# Altium PCB zynqEXP.PcbDoc (part 1 of 2)
Units mil, origin at the board's own origin, x right, y up, seen from the top; angles counter-clockwise.
Board outline 7005 x 5105 mil, 2 copper layers (Top Layer, Bottom Layer); 92 components, 234 nets, 748 pads, 222 vias.
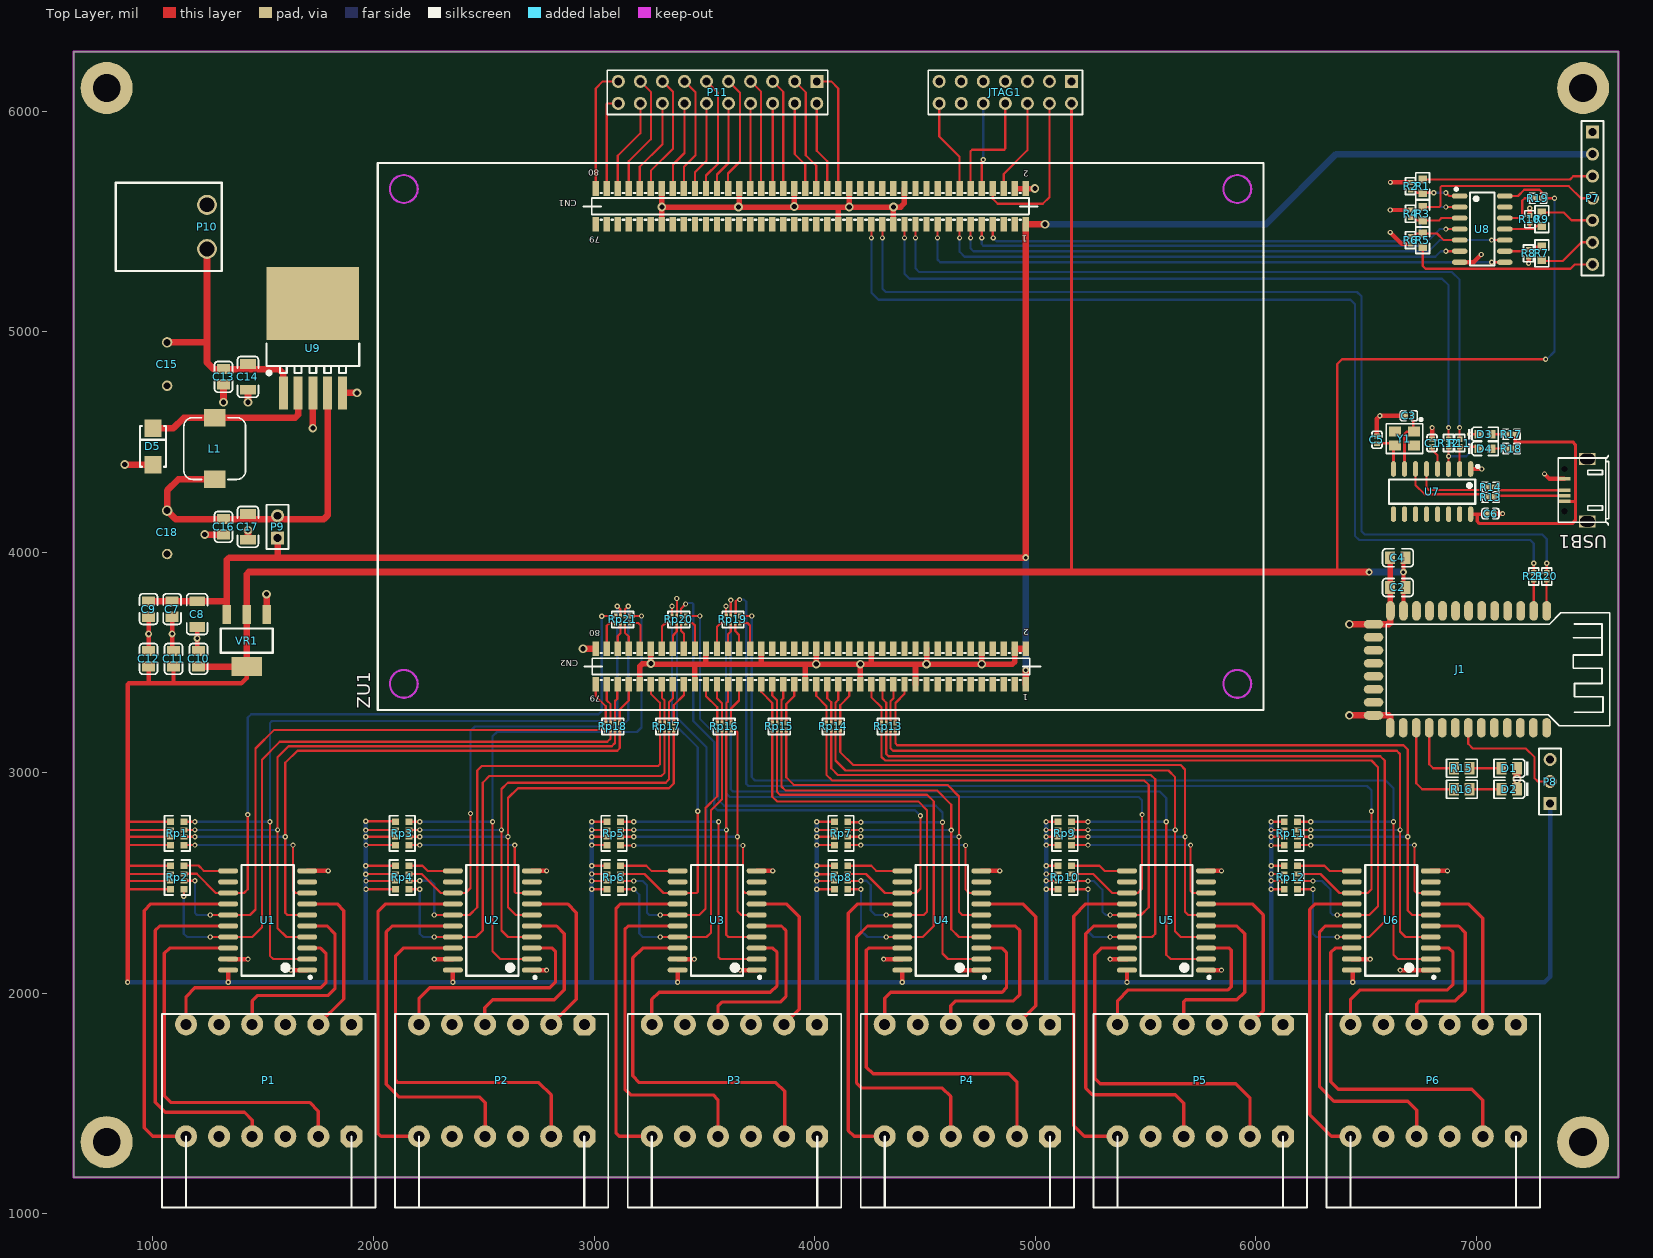
[diagram p0: Top Layer view]
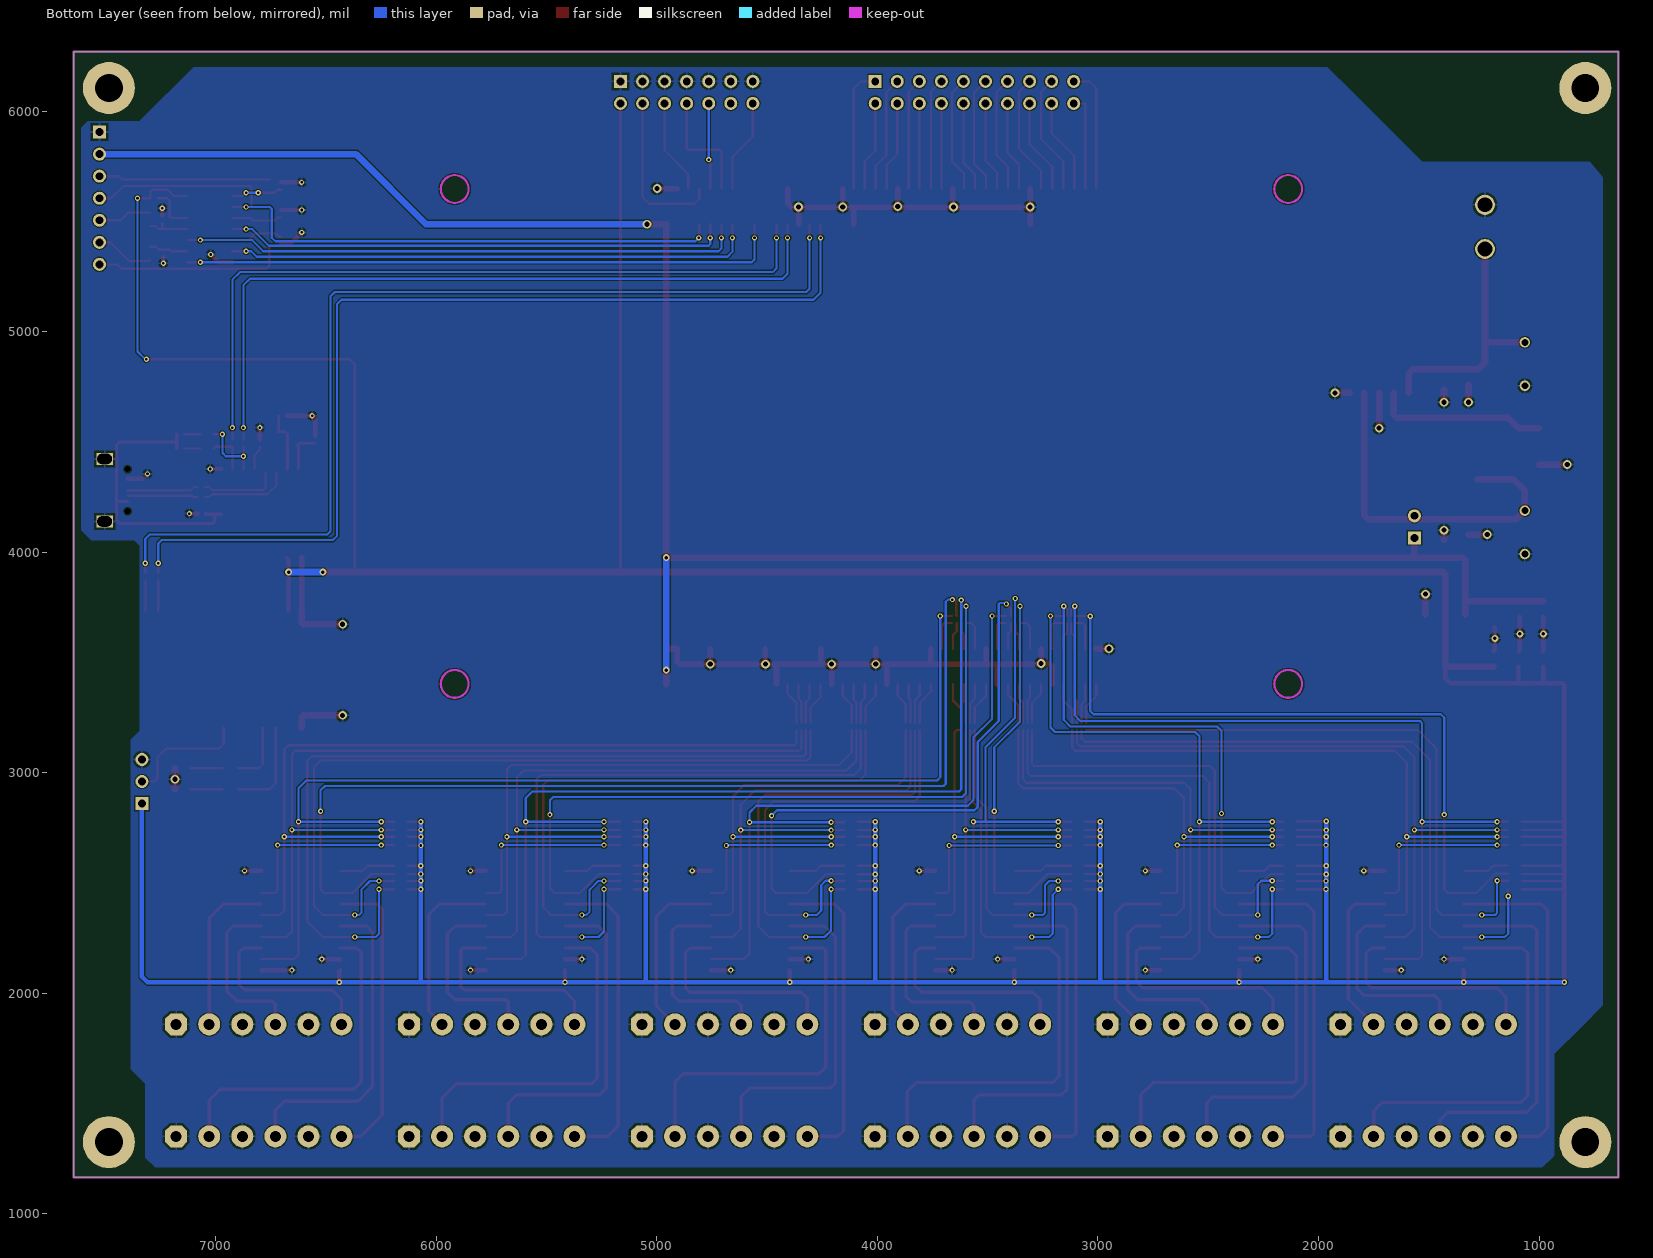
[diagram p1: Bottom Layer view, seen from below]

## Layer stack, top to bottom
Top Solder: solder mask 0.4, Solder Resist, Dk 3.5
Top Layer: signal copper 1.4
Dielectric1: dielectric 12.6, FR-4, Dk 4.8
Bottom Layer: signal copper 1.4
Bottom Solder: solder mask 0.4, Solder Resist, Dk 3.5

## Board outline
640,1165 640,6270 7645,6270 7645,1165

## Design rules (kind name [scope] priority, off if disabled: settings)
Clearance [All] p1: gap=5 ignorepadtopadclearanceinfootprint=FALSE except(0: Arc-Hole Track-Hole SMDPad-Hole THPad-Hole Via-Hole Fill-Hole Poly-Hole Region-Hole Text-Hole)
ComponentClearance [All] p1 off: gap=10 collisioncheckmode=3 verticalgap=10 showdistances=FALSE
DiffPairsRouting [All] p1: maxlimit=10 minlimit=10 mostfreqgap=10 toplayer_minwidth=15 toplayer_maxwidth=15 toplayer_prefwidth=15 bottomlayer_minwidth=15 bottomlayer_maxwidth=15 bottomlayer_prefwidth=15 maxuncoupledlength=500
PolygonConnect [All] p1: connectstyle=Relief reliefconductorwidth=10 reliefentries=4 polygonreliefangle="90 Angle" airgapwidth=10
RoutingVias [All] p1: holewidth=11.81 width=23.62 viastyle="Through Hole" minholewidth=11.81 minwidth=23.62 maxholewidth=31.5 maxwidth=39.37
SolderMaskExpansion [All] p1: expansion=4
Width [All] p1: maxlimit=50 minlimit=6 preferedwidth=15 minimp=50.000000 maximp=50.000000 favimp=50.000000
28 further rules are at their usual default settings.

## Classes and differential pairs
component class stepper: P1 P2 P3 P4 P5 P6 Rp1 Rp2 Rp3 Rp4 Rp5 Rp6 Rp7 Rp8 Rp9 Rp10 Rp11 Rp12 U1 U2 U3 U4 U5 U6
component class myirBoard: JTAG1 Rp13 Rp14 Rp15 Rp16 Rp17 Rp18 Rp19 Rp20 Rp21 ZU1
component class assistPower: C7 C8 C9 C10 C11 C12 C13 C14 C15 C16 C17 C18 D5 L1 P9 P10 U9 VR1
component class ITAC: C1 C2 C3 C4 C5 C6 D1 D2 D3 D4 J1 P8 P11 R11 R12 R13 R14 R15 R16 R17 R18 R20 R21 U7 USB1 Y1
component class protecter: P7 R1 R2 R3 R4 R5 R6 R7 R8 R9 R10 R19 U8
differential pair USB0: +USB0_P -USB0_N
differential pair USB: +USB_P -USB_N

## Components (designator, comment, footprint, x,y, rotation, side; value= is the part's Value field where it differs from the comment)
C1 "1.0uF (105) 10% 25V" 0402_C 6800,4495 r270 top
C2 "22uF (226) 20% 25V" 0805_C 6645,3840 r0 top
C3 "22pF (220) 5% 50V" 0402_C 6695,4618.27 r0 top
C4 "100nF(104) 10% 50V" 0805_C 6645,3975 r0 top
C5 "22pF (220) 5% 50V" 0402_C 6550,4510 r270 top
C6 "4.7uF (475) 20% 10V" 0402_C 7065,4175 r180 top
C7 "22uF (226) 20% 25V" 0805_C 1086.75,3742.23 r90 top
C8 "10uF (106) 10% 50V" 1206_C 1200,3719.2 r90 top
C9 "100nF(104) 10% 50V" 0805_C 980,3742.23 r90 top
C10 "100nF(104) 10% 50V" 0805_C 1206.5,3516.17 r270 top
C11 "22uF (226) 20% 25V" 0805_C 1093.25,3516.17 r270 top
C12 "10uF (106) 10% 25V" 0805_C 980,3516.17 r270 top
C13 "100nF(104) 10% 50V" 0805_C 1320,4795 r270 top
C14 "10uF (106) 10% 50V" 1206_C 1430.8,4795 r270 top
C15 "Cap" C100uF 1064.25,4853.15 r180 top
C16 "100nF(104) 10% 50V" 0805_C 1320,4115 r90 top
C17 "10uF (106) 10% 50V" 1206_C 1430.8,4115 r90 top
C18 "Cap" C100uF 1064.25,4090 r0 top
D1 "黄灯 0805" 0805_LED_S1 7150,3020 r180 top
D2 "红灯 0805" 0805_LED_S1 7150,2925 r180 top
D3 "黄灯 0603" 0603_LED_S1 7040,4535 r0 top
D4 "绿灯 0603" 0603_LED_S1 7040,4470 r0 top
D5 "SS54" SMA(DO-214AC)_S1 1000,4480 r270 top
J1 "HM-05" BT05 7035,3450 r180 top
JTAG1 "Header 7X2A" HDR2X7_CEN 5165,6135 r180 top
L1 "33uH" L-SMD-7 1280,4470 r90 top
P1 "Header 6X2A" "2EDG-3.81-06P*2 - duplicate" 1525,1605 r0 top locked
P2 "Header 6X2A" "2EDG-3.81-06P*2 - duplicate" 2581,1605 r0 top locked
P3 "Header 6X2A" "2EDG-3.81-06P*2 - duplicate" 3637,1605 r0 top locked
P4 "Header 6X2A" "2EDG-3.81-06P*2 - duplicate" 4693,1605 r0 top locked
P5 "Header 6X2A" "2EDG-3.81-06P*2 - duplicate" 5749,1605 r0 top locked
P6 "Header 6X2A" "2EDG-3.81-06P*2 - duplicate" 6805,1605 r0 top locked
P7 "Header 7" HDR1X7 7527.64,5905 r270 top
P8 "JUMP" HDR1X3 7335,2860 r90 top
P9 "Header 2" HDR1X2 1565,4065 r90 top
P10 "Header 2" 5.08-2P 1245,5475 r270 top
P11 "Header 10X2" HDR2X10 4010,6135 r180 top
R1 "16KΩ (1602) ±1%" 0603_R 6757.64,5660 r90 top
R2 "33KΩ (3302) ±1%" 0402_R 6702.64,5660 r270 top
R3 "16KΩ (1602) ±1%" 0603_R 6757.64,5535 r90 top
R4 "33KΩ (3302) ±1%" 0402_R 6702.64,5535 r270 top
R5 "16KΩ (1602) ±1%" 0603_R 6757.64,5415 r270 top
R6 "33KΩ (3302) ±1%" 0402_R 6702.64,5415 r90 top
R7 "16KΩ (1602) ±1%" 0603_R 7297.64,5355 r270 top
R8 "33KΩ (3302) ±1%" 0402_R 7237.64,5355 r90 top
R9 "16KΩ (1602) ±1%" 0603_R 7297.64,5510 r90 top
R10 "33KΩ (3302) ±1%" 0402_R 7242.64,5510 r270 top
R11 "51Ω (51R0) ±1%" 0402_R 6925,4495 r270 top
R12 "51Ω (51R0) ±1%" 0402_R 6875,4495 r270 top
R13 "0Ω (0R0) ±1%" 0402_R 7065,4250 r180 top
R14 "0Ω (0R0) ±1%" 0402_R 7065,4295 r180 top
R15 "2KΩ (2001) ±1%" 0805_R 6935,3020 r0 top
R16 "2KΩ (2001) ±1%" 0805_R 6935,2925 r0 top
R17 "2KΩ (2001) ±1%" 0402_R 7160,4535 r0 top
R18 "2KΩ (2001) ±1%" 0402_R 7160,4470 r180 top
R19 "1KΩ (1001) ±1%" 0402_R 7280,5605 r0 top
R20 "33Ω (33R0) ±1%" 0402_R 7319.48,3890 r270 top
R21 "33Ω (33R0) ±1%" 0402_R 7260.86,3890 r270 top
Rp1 "4.7KΩ (472) ±5%" 0603_Rx4 1110,2725 r270 top
Rp2 "4.7KΩ (472) ±5%" 0603_Rx4 1110,2525 r270 top
Rp3 "4.7KΩ (472) ±5%" 0603_Rx4 2130,2725 r270 top
Rp4 "4.7KΩ (472) ±5%" 0603_Rx4 2130,2525 r270 top
Rp5 "4.7KΩ (472) ±5%" 0603_Rx4 3090,2725 r270 top
Rp6 "4.7KΩ (472) ±5%" 0603_Rx4 3090,2525 r270 top
Rp7 "4.7KΩ (472) ±5%" 0603_Rx4 4120,2725 r270 top
Rp8 "4.7KΩ (472) ±5%" 0603_Rx4 4120,2525 r270 top
Rp9 "4.7KΩ (472) ±5%" 0603_Rx4 5135,2725 r270 top
Rp10 "4.7KΩ (472) ±5%" 0603_Rx4 5135,2525 r270 top
Rp11 "4.7KΩ (472) ±5%" 0603_Rx4 6160,2725 r270 top
Rp12 "4.7KΩ (472) ±5%" 0603_Rx4 6160,2525 r270 top
Rp13 "33Ω (330) ±5%" 0402_Rx4 4335,3210 r180 top
Rp14 "33Ω (330) ±5%" 0402_Rx4 4085,3210 r180 top
Rp15 "33Ω (330) ±5%" 0402_Rx4 3840,3210 r180 top
Rp16 "33Ω (330) ±5%" 0402_Rx4 3590,3210 r180 top
Rp17 "33Ω (330) ±5%" 0402_Rx4 3330,3210 r180 top
Rp18 "33Ω (330) ±5%" 0402_Rx4 3085,3210 r180 top
Rp19 "33Ω (330) ±5%" 0402_Rx4 3630,3695 r180 top
Rp20 "33Ω (330) ±5%" 0402_Rx4 3385,3695 r180 top
Rp21 "33Ω (330) ±5%" 0402_Rx4 3130,3695 r180 top
U1 "74HC244D" SOIC-20_300mil 1520,2330 r90 top locked
U2 "74HC244D" SOIC-20_300mil 2539,2330 r90 top locked
U3 "74HC244D" SOIC-20_300mil 3558,2330 r90 top locked
U4 "74HC244D" SOIC-20_300mil 4577,2330 r90 top locked
U5 "74HC244D" SOIC-20_300mil 5596,2330 r90 top locked
U6 "74HC244D" SOIC-20_300mil 6615,2330 r90 top locked
U7 "CH340G" SOIC-16_150mil 6800,4275 r180 top
U8 "74HC04D" SOIC-14_150mil 7027.64,5465 r270 top
U9 "LM2596SX-5.0/NOPB" TO-263-5 1725,4722.44 r270 top
USB1 "USB_5line" USB-MICRO-5P-2F 7400,4230 r270 top
VR1 "AMS1117-3.3" SOT-223 1425,3599.2 r90 top
Y1 "12MHZ 20PF 10PPM" SMD-3225_4P 6675,4515 r180 top
ZU1 "Z_Turn_Interface" ZTURN 6035,5765 r180 top locked

## Footprints (in the part's own frame and the unit in brackets; to place one, negate y for a bottom-side part, rotate by r counter-clockwise, add the part's x,y. Pads: shape width x height; smd on the part's side, far side on the other; paste and mask are expansions set on the pad)
"2EDG-3.81-06P*2 - duplicate" [mm]
  oct 2.54x2.54 hole 1.27: 1(9.525,-6.45) 7(9.525,6.45)
  round 2.54 hole 1.27: 2(5.715,-6.45) 3(1.905,-6.45) 4(-1.905,-6.45) 5(-5.715,-6.45) 6(-9.525,-6.45) 8(5.715,6.45) 9(1.905,6.45) 10(-1.905,6.45) 11(-5.715,6.45) 12(-9.525,6.45)
  silkscreen extent -12.29,-14.65 12.29,7.65
5.08-2P [mm]
  round 2.3 hole 1.7: 1(-2.54,0) 2(2.54,0)
  silkscreen extent -5.08,-10.5 5.08,1.7
0402_C [mm]
  rect 0.6x0.65 smd mask+0.051: 1(-0.425,0) 2(0.425,0)
  silkscreen extent -0.97,-0.58 0.97,0.58, body extent -0.48,-0.3 0.52,0.3, height 0.2
0402_R [mm]
  rect 0.6x0.65 smd mask+0.051: 1(-0.425,0) 2(0.425,0)
  silkscreen extent -0.97,-0.58 0.97,0.58, body extent -0.57,-0.27 0.58,0.28, height 0.41
0402_Rx4 [mm]
  rect 0.4x0.55 smd mask+0.051: 1(-0.8,-0.4) 4(0.8,-0.4) 5(0.8,0.4) 8(-0.8,0.4)
  rect 0.3x0.55 smd mask+0.051: 2(-0.25,-0.4) 3(0.25,-0.4) 6(0.25,0.4) 7(-0.25,0.4)
  silkscreen extent -1.25,-0.93 1.25,0.92, body extent -1,-0.5 1,0.5, height 0.45
0603_LED_S1 [mm]
  rect 0.93x0.98 smd: A(0.77,0) K(-0.77,0)
  silkscreen extent -1.97,-0.79 1.54,0.79, body extent -0.8,-0.4 0.8,0.4, height 0.6
0603_R [mm]
  rect 0.93x0.98 smd: 1(-0.77,0) 2(0.77,0)
  silkscreen extent -1.53,-0.79 1.54,0.79, body extent -0.85,-0.4 0.85,0.4, height 0.56
0603_Rx4 [mm]
  rect 0.75x0.8 smd mask+0.051: 1(-1.35,-0.77) 4(1.35,-0.77) 5(1.35,0.77) 8(-1.35,0.77)
  rect 0.58x0.8 smd mask+0.051: 2(-0.4,-0.77) 3(0.4,-0.77) 6(0.4,0.77) 7(-0.4,0.77)
  silkscreen extent -2.02,-1.47 2.02,1.47, body extent -1.6,-0.8 1.6,0.8, height 0.55
0805_C [mm]
  rect 1.16x1.47 smd: 1(-0.89,0) 2(0.89,0)
  silkscreen extent -1.77,-1.04 1.77,1.04, body extent -1,-0.62 1,0.63, height 0.77
0805_LED_S1 [mm]
  rect 1.16x1.47 smd: A(0.89,0) K(-0.89,0)
  silkscreen extent -2.25,-1.04 1.77,1.03, body extent -1.01,-0.62 1.01,0.62, height 1.1
0805_R [mm]
  rect 1.16x1.47 smd: 1(-0.89,0) 2(0.89,0)
  silkscreen extent -1.77,-1.04 1.77,1.03, body extent -1,-0.62 1,0.63, height 0.49
1206_C [mm]
  rect 1.13x1.8 smd: 1(-1.49,0) 2(1.49,0)
  silkscreen extent -2.36,-1.2 2.35,1.2, body extent -1.6,-0.81 1.6,0.79, height 1
BT05 [mm]
  oval 1x2.254 smd: 1(-7.237,-7.214) 2(-5.737,-7.214) 3(-4.237,-7.214) 4(-2.737,-7.214) 5(-1.237,-7.214) 6(0.263,-7.214) 7(1.763,-7.214) 8(3.263,-7.214) 9(4.763,-7.214) 10(6.263,-7.214) 11(7.763,-7.214) 12(9.263,-7.214) 13(10.763,-7.214) 22(10.797,6.248) 23(9.297,6.248) 24(7.797,6.248) 25(6.297,6.248) 26(4.797,6.248) 27(3.297,6.248) 28(1.797,6.248) 29(0.297,6.248) 30(-1.203,6.248) 31(-2.703,6.248) 32(-4.203,6.248) 33(-5.703,6.248) 34(-7.226,6.248)
  oval 2.254x1 smd: 14(12.713,-5.671) 15(12.713,-4.171) 16(12.713,-2.671) 17(12.713,-1.171) 18(12.713,0.329) 19(12.713,1.829) 20(12.713,3.329) 21(12.713,4.829)
  silkscreen extent -14.49,-6.99 11.24,6.01
C100uF [mm]
  round 1.2 hole 0.8: 1(0,2.5) 2(0,-2.5)
HDR1X2 [mm] "Connector; Header; 2 Position"
  rect 1.5x1.5 hole 0.9: 1(0,0)
  round 1.5 hole 0.9: 2(2.54,0)
  silkscreen extent -1.27,-1.27 3.81,1.27, body extent -1.27,-1.27 3.81,1.27, height 7.58
HDR1X3 [mm] "Connector; Header; 3 Position"
  rect 1.5x1.5 hole 0.9: 1(0,0)
  round 1.5 hole 0.9: 2(2.54,0) 3(5.08,0)
  silkscreen extent -1.27,-1.27 6.35,1.27
HDR1X7 [mm] "Connector; Header; 7 Position"
  rect 1.5x1.5 hole 0.9: 1(0,0)
  round 1.5 hole 0.9: 2(2.54,0) 3(5.08,0) 4(7.62,0) 5(10.16,0) 6(12.7,0) 7(15.24,0)
  silkscreen extent -1.27,-1.27 16.51,1.27
HDR2X7_CEN [mm] "Connector; Header; 7x2 Position"
  rect 1.5x1.5 hole 0.9: 1(0,0)
  round 1.5 hole 0.9: 2(2.54,0) 3(5.08,0) 4(7.62,0) 5(10.16,0) 6(12.7,0) 7(15.24,0) 8(0,2.54) 9(2.54,2.54) 10(5.08,2.54) 11(7.62,2.54) 12(10.16,2.54) 13(12.7,2.54) 14(15.24,2.54)
  silkscreen extent -1.27,-1.27 16.51,3.81
HDR2X10 [mm] "Connector; Header; 10x2 Position"
  rect 1.5x1.5 hole 0.9: 1(0,0)
  round 1.5 hole 0.9: 2(0,2.54) 3(2.54,0) 4(2.54,2.54) 5(5.08,0) 6(5.08,2.54) 7(7.62,0) 8(7.62,2.54) 9(10.16,0) 10(10.16,2.54) 11(12.7,0) 12(12.7,2.54) 13(15.24,0) 14(15.24,2.54) 15(17.78,0) 16(17.78,2.54) 17(20.32,0) 18(20.32,2.54) 19(22.86,0) 20(22.86,2.54)
  silkscreen extent -1.27,-1.27 24.13,3.81, body extent -1.27,-1.27 24.13,3.81, height 7.58
L-SMD-7 [mm]
  rect 2x2.5 smd: 1(-3.556,0) 2(3.556,0)
  silkscreen extent -3.56,-3.56 3.56,3.56, body extent -3.56,-3.56 3.56,3.56, height 4
SMA(DO-214AC)_S1 [mm]
  rect 2x2 smd: 1(2.1,0) 2(-2.1,0)
  silkscreen extent -2.35,-1.5 2.35,1.5
SMD-3225_4P [mm]
  rect 1.4x1.15 smd: 1(-1.1,-0.8) 2(1.1,-0.8) 3(1.1,0.8) 4(-1.1,0.8)
  silkscreen extent -2.1,-2.35 2.1,1.7, body extent -1.6,-1.25 1.6,1.25, height 0.61
SOIC-14_150mil [mm]
  oval 0.6x1.8 smd: 1(-3.81,-2.6) 2(-2.54,-2.6) 3(-1.27,-2.6) 4(0,-2.6) 5(1.27,-2.6) 6(2.54,-2.6) 7(3.81,-2.6) 8(3.81,2.6) 9(2.54,2.6) 10(1.27,2.6) 11(0,2.6) 12(-1.27,2.6) 13(-2.54,2.6) 14(-3.81,2.6)
  silkscreen extent -4.75,-3.15 4.2,1.4
SOIC-16_150mil [mm]
  oval 0.6x1.8 smd: 1(-4.445,-2.6) 2(-3.175,-2.6) 3(-1.905,-2.6) 4(-0.635,-2.6) 5(0.635,-2.6) 6(1.905,-2.6) 7(3.175,-2.6) 8(4.445,-2.6) 9(4.445,2.6) 10(3.175,2.6) 11(1.905,2.6) 12(0.635,2.6) 13(-0.635,2.6) 14(-1.905,2.6) 15(-3.175,2.6) 16(-4.445,2.6)
  silkscreen extent -5.4,-3.05 4.97,1.4, body extent -4.95,-2.97 4.95,3.03, height 1.75
SOIC-20_300mil [mm]
  oval 0.6x2.3 smd: 1(-5.715,-4.55) 2(-4.445,-4.55) 3(-3.175,-4.55) 4(-1.905,-4.55) 5(-0.635,-4.55) 6(0.635,-4.55) 7(1.905,-4.55) 8(3.175,-4.55) 9(4.445,-4.55) 10(5.715,-4.55) 11(5.715,4.55) 12(4.445,4.55) 13(3.175,4.55) 14(1.905,4.55) 15(0.635,4.55) 16(-0.635,4.55) 17(-1.905,4.55) 18(-3.175,4.55) 19(-4.445,4.55) 20(-5.715,4.55)
  silkscreen extent -6.7,-5.05 6.38,3
SOT-223 [mm]
  rect 2.2x1 smd: 1(3,-2.3) 2(3,0) 3(3,2.3)
  rect 2.2x3.5 smd: 2(-3,0)
  silkscreen extent -1.4,-3 1.4,3, body extent -3.49,-3.24 3.49,3.24, height 1.64
TO-263-5 [mm]
  rect 8.4x10.65 smd: 0(-10.3,0)
  rect 3.8x1.05 smd: 1(0,-3.4) 2(0,-1.7) 3(0,0) 4(0,1.7) 5(0,3.4)
  silkscreen extent -5.65,-5.35 -2.1,5.35
USB-MICRO-5P-2F [mm]
  round 0 hole 0.7: 0(-3.725,0) 0(1.125,0)
  rect 0.4x1.4 smd: 1(0,0) 2(-0.65,0) 3(-1.3,0) 5(-2.6,0)
  rect 1.4x1.9 hole 1.2 slot 1.7 at 90 deg: 6(2.3,2.65) 7(-4.9,2.65)
  silkscreen extent -5.3,-0.7 2.7,5.1
ZTURN [mm]
  rect 0.74x1.7 smd: 1(27.365,7.05) 2(27.365,2.95) 3(28.635,7.05) 4(28.635,2.95) 5(29.905,7.05) 6(29.905,2.95) 7(31.175,7.05) 8(31.175,2.95) 9(32.445,7.05) 10(32.445,2.95) 11(33.715,7.05) 12(33.715,2.95) 13(34.985,7.05) 14(34.985,2.95) 15(36.255,7.05) 16(36.255,2.95) 17(37.525,7.05) 18(37.525,2.95) 19(38.795,7.05) 20(38.795,2.95) 21(40.065,7.05) 22(40.065,2.95) 23(41.335,7.05) 24(41.335,2.95) 25(42.605,7.05) 26(42.605,2.95) 27(43.875,7.05) 28(43.875,2.95) 29(45.145,7.05) 30(45.145,2.95) 31(46.415,7.05) 32(46.415,2.95) 33(47.685,7.05) 34(47.685,2.95) 35(48.955,7.05) 36(48.955,2.95) 37(50.225,7.05) 38(50.225,2.95) 39(51.495,7.05) 40(51.495,2.95) 41(52.765,7.05) 42(52.765,2.95) 43(54.035,7.05) 44(54.035,2.95) 45(55.305,7.05) 46(55.305,2.95) 47(56.575,7.05) 48(56.575,2.95) 49(57.845,7.05) 50(57.845,2.95) 51(59.115,7.05) 52(59.115,2.95) 53(60.385,7.05) 54(60.385,2.95) 55(61.655,7.05) 56(61.655,2.95) 57(62.925,7.05) 58(62.925,2.95) 59(64.195,7.05) 60(64.195,2.95) 61(65.465,7.05) 62(65.465,2.95) 63(66.735,7.05) 64(66.735,2.95) 65(68.005,7.05) 66(68.005,2.95) 67(69.275,7.05) 68(69.275,2.95) 69(70.545,7.05) 70(70.545,2.95) 71(71.815,7.05) 72(71.815,2.95) 73(73.085,7.05) 74(73.085,2.95) 75(74.355,7.05) 76(74.355,2.95) 77(75.625,7.05) 78(75.625,2.95) 79(76.895,7.05) 80(76.895,2.95) 81(27.365,60.05) 82(27.365,55.95) 83(28.635,60.05) 84(28.635,55.95) 85(29.905,60.05) 86(29.905,55.95) 87(31.175,60.05) 88(31.175,55.95) 89(32.445,60.05) 90(32.445,55.95) 91(33.715,60.05) 92(33.715,55.95) 93(34.985,60.05) 94(34.985,55.95) 95(36.255,60.05) 96(36.255,55.95) 97(37.525,60.05) 98(37.525,55.95) 99(38.795,60.05) 100(38.795,55.95) 101(40.065,60.05) 102(40.065,55.95) 103(41.335,60.05) 104(41.335,55.95) 105(42.605,60.05) 106(42.605,55.95) 107(43.875,60.05) 108(43.875,55.95) 109(45.145,60.05) 110(45.145,55.95) 111(46.415,60.05) 112(46.415,55.95) 113(47.685,60.05) 114(47.685,55.95) 115(48.955,60.05) 116(48.955,55.95) 117(50.225,60.05) 118(50.225,55.95) 119(51.495,60.05) 120(51.495,55.95) 121(52.765,60.05) 122(52.765,55.95) 123(54.035,60.05) 124(54.035,55.95) 125(55.305,60.05) 126(55.305,55.95) 127(56.575,60.05) 128(56.575,55.95) 129(57.845,60.05) 130(57.845,55.95) 131(59.115,60.05) 132(59.115,55.95) 133(60.385,60.05) 134(60.385,55.95) 135(61.655,60.05) 136(61.655,55.95) 137(62.925,60.05) 138(62.925,55.95) 139(64.195,60.05) 140(64.195,55.95) 141(65.465,60.05) 142(65.465,55.95) 143(66.735,60.05) 144(66.735,55.95) 145(68.005,60.05) 146(68.005,55.95) 147(69.275,60.05) 148(69.275,55.95) 149(70.545,60.05) 150(70.545,55.95) 151(71.815,60.05) 152(71.815,55.95) 153(73.085,60.05) 154(73.085,55.95) 155(74.355,60.05) 156(74.355,55.95) 157(75.625,60.05) 158(75.625,55.95) 159(76.895,60.05) 160(76.895,55.95)
  Keep-Out Layer circle w0.254: c3,3 r1.6
  Keep-Out Layer circle w0.254: c99,3 r1.6
  Keep-Out Layer circle w0.254: c99,60 r1.6
  Keep-Out Layer circle w0.254: c3,60 r1.6
  silkscreen extent 0,0 102,63

## Part data
C1: library part "0402 1.0uF (105) 10% 25V", "贴片电容"
C2 C7 C11: library part "0805 22uF (226) 20% 25V", "贴片电容"
C3 C5: library part "0402 22pF (220) 5% 50V", "贴片电容"
C4 C9 C10 C13 C16: library part "0805 100nF(104) 10% 50V", "贴片电容"
C6: library part "0402 4.7uF (475) 20% 10V", "贴片电容"
C8 C14 C17: library part "1206 10uF (106) 10% 50V", "贴片电容"
C12: library part "0805 10uF (106) 10% 25V", "贴片电容"
C15 C18: "贴片电容"
D1: library part "0805 黄灯", "发光二极管"
D2: library part "0805 红灯", "发光二极管"
D3: library part "0603 黄灯", "发光二极管"
D4: library part "0603 绿灯", "发光二极管"
D5: library part "SMA(DO-214AC) SS54", "二极管"
JTAG1: "Header, 7-Pin, Dual row"
L1: library part Inductor, "Inductor"
P1 P2 P3 P4 P5 P6: "Header, 6-Pin, Dual row"
P7: "Header, 7-Pin"
P8: library part "Header 3", "Header, 3-Pin"
P9 P10: "Header, 2-Pin"
P11: "Header, 10-Pin, Dual row"
R1 R3 R5 R7 R9: library part "0603 16KΩ (1602) 1%", "贴片电阻"
R2 R4 R6 R8 R10: library part "0402 33KΩ (3302) 1%", "贴片电阻"
R11 R12: library part "0402 51Ω (51R0) 1%", "贴片电阻"
R13 R14: library part "0402 0Ω (0R0) 1%", "贴片电阻"
R15 R16: library part "0805 2KΩ (2001) 1%", "贴片电阻"
R17 R18: library part "0402 2KΩ (2001) 1%", "贴片电阻"
R19: library part "0402 1KΩ (1001) 1%", "贴片电阻"
R20 R21: library part "0402 33Ω (33R0) 1%", "贴片电阻"
Rp1 Rp2 Rp3 Rp4 Rp5 Rp6 Rp7 Rp8 Rp9 Rp10 Rp11 Rp12: library part "0603*4  4.7KΩ (472) 5%", "贴片排阻"
Rp13 Rp14 Rp15 Rp16 Rp17 Rp18 Rp19 Rp20 Rp21: library part "0402*4 33Ω (330) 5%", "贴片排阻"
U1 U2 U3 U4 U5 U6: library part 74HC244D_[C5622], "74系列逻辑芯片"
U7: library part CH340G_[C14267], "USB"
U9: library part LM2596SX-5.0/NOPB_[C10002], "DC-DCоƬ"
VR1: library part "SOT-223 AMS1117-3.3", "低压差线性稳压(LDO)"
Y1: library part "SMD-3225_4P  12MHZ 20PF 10PPM", "贴片晶振"

## Free pads (board coordinates)
  round 236.22 hole 125.98: 0(7485,1325) 0(7485,6105) 2(790,6105) 3(790,1325)

## Via types
v1: diameter 23.62, hole 11.81, Top Layer to Bottom Layer, tented both sides, 191 vias
v2: diameter 39.37, hole 23.62, Top Layer to Bottom Layer, tented both sides, 24 vias
v3: diameter 31.5, hole 15.75, Top Layer to Bottom Layer, tented both sides, 7 vias

## Nets (pads, with @x,y where several pads share a name; then routed paths per layer and width w, separated by ;. In a path a pad name is that pad's centre, name@x,y a point inside that pad or via, vN(x,y) a via of type N, cw(c..) or ccw(c..) an arc to the next point about the centre after c; other vN are vias at no path point)
1A: R1.1 R2.2 U8.1 | length 234.6
  Top Layer w10: R2.2@6702.64,5643.27 6719.37,5643.27 6732.95,5629.69 R1.1@6757.64,5629.69 v1(6807.64,5629.69) ; v1(6862.64,5630) 6877.64,5615 U8.1@6925.28,5615
  Bottom Layer w10: v1(6807.64,5629.69) 6807.95,5630 v1(6862.64,5630)
2A: R3.1 R4.2 U8.3 | length 232.5
  Top Layer w10: R4.2@6702.64,5518.27 6719.37,5518.27 6732.95,5504.69 R3.1@6757.64,5504.69 6832.32,5504.69 6842.64,5515 U8.3@6925.28,5515
3A: R9.1 R10.2 U8.11 | length 202
  Top Layer w10: U8.11@7130,5465 7242.64,5465 ; R10.2@7242.64,5493.27 7242.64,5465 ; R9.1@7297.64,5479.69 7275.39,5479.69 7260.71,5465 7242.64,5465
3V3: C2.2 C4.2 C10.2 C11.2 C12.2 J1.12 JTAG1.8 P8.1 R19.2 Rp1.1 Rp1.2 Rp1.3 Rp1.4 Rp2.1 Rp2.2 Rp2.3 Rp2.4 Rp3.1 Rp3.2 Rp3.3 Rp3.4 Rp4.1 Rp4.2 Rp4.3 Rp4.4 Rp5.1 Rp5.2 Rp5.3 Rp5.4 Rp6.1 Rp6.2 Rp6.3 Rp6.4 Rp7.1 Rp7.2 Rp7.3 Rp7.4 Rp8.1 Rp8.2 Rp8.3 Rp8.4 Rp9.1 Rp9.2 Rp9.3 Rp9.4 Rp10.1 Rp10.2 Rp10.3 Rp10.4 Rp11.1 Rp11.2 Rp11.3 Rp11.4 Rp12.1 Rp12.2 Rp12.3 Rp12.4 U1.20 U2.20 U3.20 U4.20 U5.20 U6.20 U8.14 VR1.2 | length 29253.3
  Top Layer w10: 885,2471.85 Rp2.4@1079.69,2471.85 ; 885,2510 885.75,2509.25 Rp2.3@1079.69,2509.25 ; 885,2541.5 885.75,2540.75 Rp2.2@1079.69,2540.75 ; 885,2578.15 Rp2.1@1079.69,2578.15 ; 885,2680 893.15,2671.85 Rp1.4@1079.69,2671.85 ; 885,2710 885.75,2709.25 Rp1.3@1079.69,2709.25 ; 885,2745 889.25,2740.75 Rp1.2@1079.69,2740.75 ; 885,2780 886.85,2778.15 Rp1.1@1079.69,2778.15 ; v1(1965,2578.15) Rp4.1@2099.69,2578.15 ; v1(1965,2710) 1965.75,2709.25 Rp3.3@2099.69,2709.25 ; v1(1965,2740) 1965.75,2740.75 Rp3.2@2099.69,2740.75 ; v1(1965,2780) 2097.83,2780 Rp3.1@2099.69,2778.15 ; v1(1965.75,2471.85) Rp4.4@2099.69,2471.85 ; v1(1965.75,2509.25) Rp4.3@2099.69,2509.25 ; v1@1965.75,2540.75 Rp4.2@2099.69,2540.75 ; v1(1965.75,2671.85) Rp3.4@2099.69,2671.85 ; v1(2990,2471.85) Rp6.4@3059.69,2471.85 ; v1(2990,2509.25) Rp6.3@3059.69,2509.25 ; v1(2990,2540.75) Rp6.2@3059.69,2540.75 ; v1(2990,2578.15) Rp6.1@3059.69,2578.15 ; v1(2990,2671.85) Rp5.4@3059.69,2671.85 ; v1(2990,2709.25) Rp5.3@3059.69,2709.25 ; v1(2990,2740.75) Rp5.2@3059.69,2740.75 ; v1(2990,2778.15) Rp5.1@3059.69,2778.15 ; v1(4010,2471.85) Rp8.4@4089.69,2471.85 ; v1(4010,2509.25) Rp8.3@4089.69,2509.25 ; v1(4010,2540) 4088.94,2540 Rp8.2@4089.69,2540.75 ; v1(4010,2578.15) Rp8.1@4089.69,2578.15 ; v1(4010,2671.85) Rp7.4@4089.69,2671.85 ; v1(4010,2709.25) Rp7.3@4089.69,2709.25 ; v1(4010,2740.75) Rp7.2@4089.69,2740.75 ; v1(4010,2778.15) Rp7.1@4089.69,2778.15 ; v1(5050,2510) 5050.75,2509.25 Rp10.3@5104.69,2509.25 ; v1(5050,2710) 5050.75,2709.25 Rp9.3@5104.69,2709.25 ; v1(5050,2740.75) Rp9.2@5104.69,2740.75 ; v1(5050,2778.15) Rp9.1@5104.69,2778.15 ; v1(5050.75,2471.85) Rp10.4@5104.69,2471.85 ; v1(5050.75,2540.75) Rp10.2@5104.69,2540.75 ; v1(5050.75,2578.15) Rp10.1@5104.69,2578.15 ; v1(5050.75,2671.85) Rp9.4@5104.69,2671.85 ; v1(6070,2471.85) Rp12.4@6129.69,2471.85 ; v1(6070,2510) 6070.75,2509.25 Rp12.3@6129.69,2509.25 ; v1(6070,2670) 6127.83,2670 Rp11.4@6129.69,2671.85 ; v1(6070,2710) 6070.75,2709.25 Rp11.3@6129.69,2709.25 ; v1(6070,2740.75) Rp11.2@6129.69,2740.75 ; v1(6070,2778.15) Rp11.1@6129.69,2778.15 ; v1(6070.75,2540.75) Rp12.2@6129.69,2540.75 ; v1(6070.75,2578.15) Rp12.1@6129.69,2578.15 ; 6355,3910 6370,3925 6370,4853.66 6391.34,4875 v1(7315,4875) ; U8.14@7130,5615 7190,5615 7218.27,5643.27 7286.73,5643.27 7296.73,5633.27 R19.2@7296.73,5605 v1(7355,5605)
  Top Layer w15: 5165,3910 JTAG1.8@5165,6035 ; C4.2@6670.31,3965.27 C4.2@6680.04,3975
  Top Layer w20: v1(885,2050) 885,2471.85 885,2510 885,2541.5 885,2578.15 885,2680 885,2710 885,2745 885,2780 885,3400 890,3405 980,3405 ; C12.2@980,3481.13 980,3405 ; C11.2@1093.25,3481.13 1093.25,3406.75 1095,3405 ; v1(1340.87,2050) U1.20@1340.87,2105 ; VR1.2@1425,3481.09 1424.96,3429.13 1400.83,3405 1095,3405 ; U2.20@2359.87,2105 2359.87,2050.13 v1(2360,2050) ; v1(3378.87,2050) U3.20@3378.87,2105 ; v1(4397.87,2050) U4.20@4397.87,2105 ; v1(5416.87,2050) U5.20@5416.87,2105 ; U6.20@6435.87,2105 6440,2100.87 v1(6440,2050) ; J1.12@6670.31,3734 C4.2@6670.31,3965 ; 980,3405 1095,3405
  Top Layer w30: C10.2@1206.5,3481.13 VR1.2@1425,3481.09 ; VR1.2@1425,3481.09 VR1.2@1425,3481.09 ; v3(6515,3910) 6355,3910 5165,3910 1435,3910 1425,3900 VR1.2@1425,3717.31 1425,3481.17 VR1.2@1425,3481.09
  Bottom Layer w10: v1(7315,4875) 7320,4875 7355,4910 v1(7355,5605)
  Bottom Layer w20: v1(885,2050) v1(1340.87,2050) 1965,2050 ; v1(1965,2780) v1(1965,2740) v1(1965,2710) v1(1965,2578.15) v1(1965,2540) 1965,2050 ; v1(2990,2778.15) v1(2990,2740.75) v1(2990,2709.25) v1(2990,2671.85) v1(2990,2578.15) v1(2990,2540.75) v1(2990,2509.25) v1(2990,2471.85) 2990,2050 ; v1(4010,2778.15) v1(4010,2740.75) v1(4010,2709.25) v1(4010,2671.85) v1(4010,2578.15) v1(4010,2540) v1(4010,2509.25) v1(4010,2471.85) 4010,2050 ; v1(5050,2778.15) v1(5050,2740.75) v1(5050,2710) v1(5050,2510) 5050,2050 ; v1(6070,2778.15) v1(6070,2740.75) v1(6070,2710) v1(6070,2670) v1(6070,2510) v1(6070,2471.85) 6070,2050 ; P8.1@7335,2860 7335,2075 7310,2050 v1(6440,2050) 6070,2050 ; 1965,2050 v1(2360,2050) 2990,2050 ; 2990,2050 v1(3378.87,2050) 4010,2050 ; 4010,2050 v1(4397.87,2050) 5050,2050 ; 5050,2050 v1(5416.87,2050) 6070,2050
  Bottom Layer w30: v3(6515,3910) v3(6670,3910)
4A: R7.1 R8.2 U8.9 | length 176.1
  Top Layer w10: U8.9@7130,5365 7202.64,5365 7209.37,5371.73 R8.2@7237.64,5371.73 7259.37,5371.73 7272.95,5385.31 R7.1@7297.64,5385.31
5A: R5.1 R6.2 U8.5 | length 240.8
  Top Layer w10: R6.2@6702.64,5431.73 6714.06,5431.73 6727.64,5445.31 R5.1@6757.64,5445.31 6822.32,5445.31 6852.64,5415 U8.5@6925.28,5415
5V: C16.2 C17.2 C18.1 L1.1 P9.2 U9.4 | length 1633.7
  Top Layer w30: L1.1@1280,4330 1115,4330 1064.25,4279.25 C18.1@1064.25,4188.43 1102.64,4150.04 C16.2@1320,4150.04 1775.04,4150.04 1791.93,4166.93 U9.4@1791.93,4722.44
5V0: C7.2 C8.2 C9.2 P7.2 P9.1 VR1.3 ZU1.1 ZU1.81 | length 9110.3
  Top Layer w30: C9.2@980,3777.27 C7.2@1086.75,3777.27 1327.18,3777.27 1334.45,3770 ; VR1.3@1334.45,3717.31 1334.45,3770 ; P9.1@1565,4065 1565,3975 ; ZU1.81@4957.64,3400.83 v3(4957.64,3465) ; v2(5045,5487.44) ZU1.1@4957.64,5487.44 v3(4957.64,3975) 1565,3975 ; 1334.45,3770 1334.45,3964.45 1345,3975 1565,3975
  Bottom Layer w30: v3(4957.64,3465) v3(4957.64,3975) ; v2(5045,5487.44) 6047.44,5487.44 6365,5805 P7.2@7527.64,5805
24V0: C13.1 C14.1 C15.2 P10.2 U9.1 | length 1150.9
  Top Layer w30: C15.2@1064.25,4951.57 1241.57,4951.57 1245,4955 ; P10.2@1245,5375 1245,4955 ; U9.1@1591.14,4722.44 1591.14,4808.86 1569.96,4830.04 C13.1@1320,4830.04 1274.96,4830.04 1245,4860 1245,4955
B13_LN11: U8.4 ZU1.9 | length 2291.8
  Top Layer w10: v1(4757.64,5425) ZU1.9@4757.64,5487.44 ; v1(6862.64,5465) U8.4@6925.28,5465
  Bottom Layer w10: v1(4757.64,5425) 4757.64,5397.36 4765,5390 6760,5390 6835,5465 v1(6862.64,5465)
B13_LN12: U8.6 ZU1.13 | length 2409.7
  Top Layer w10: v1@4657.64,5427.64 ZU1.13@4657.64,5487.44 ; v1(6862.64,5365) U8.6@6925.28,5365
  Bottom Layer w10: v1(4657.64,5425) 4657.64,5362.36 4680,5340 6815,5340 6840,5365 v1(6862.64,5365)
B13_LN13: ZU1.19
B13_LN14: ZU1.18
B13_LN15: R12.1 ZU1.23 | length 3412.4
  Top Layer w10: v1(4407.64,5425) ZU1.23@4407.64,5487.44 ; R12.1@6875,4511.73 v1(6875,4565)
  Bottom Layer w10: v1(4407.64,5425) 4407.64,5262.36 4430,5240 6845,5240 6875,5210 v1(6875,4565)
B13_LN21: ZU1.22
B13_LP11: U8.2 ZU1.7 | length 2325.5
  Top Layer w10: ZU1.7@4807.64,5487.44 4807.64,5427.36 v1(4810,5425) ; v1(6862.64,5565.32) 6862.95,5565 U8.2@6925.28,5565
  Bottom Layer w10: v1(4810,5425) 4825,5410 6730,5410 6746.15,5426.15 6746.15,5556.15 6755.32,5565.32 v1(6862.64,5565.32)
B13_LP12: U8.10 ZU1.11 | length 2558.3
  Top Layer w10: v1(4707.64,5425) ZU1.11@4707.64,5487.44 ; v1(7070,5415) U8.10@7130,5415
  Bottom Layer w10: v1(4707.64,5425) 4707.64,5377.36 4720,5365 6785,5365 6835,5415 v1(7070,5415)
B13_LP13: U8.8 ZU1.17 | length 2734.9
  Top Layer w10: v1@4557.64,5427.64 ZU1.17@4557.64,5487.44 ; v1(7070,5315) U8.8@7130,5315
  Bottom Layer w10: v1(4557.64,5425) 4557.64,5327.36 4570,5315 v1(7070,5315)
B13_LP14: ZU1.16
B13_LP15: R11.1 ZU1.21 | length 3412.4
  Top Layer w10: v1(4457.64,5425) ZU1.21@4457.64,5487.44 ; R11.1@6925,4511.73 v1(6925,4565)
  Bottom Layer w10: v1(4457.64,5425) 4457.64,5287.36 4475,5270 6890,5270 6925,5235 v1(6925,4565)
B13_LP21: ZU1.20
B34_L9N: ZU1.53
B34_L9P: ZU1.51
B34_L12N: ZU1.57
B34_L12P: ZU1.55
B34_L14N: ZU1.61
B34_L14P: ZU1.59
B34_L16N: ZU1.65
B34_L16P: ZU1.63
B34_L18N: ZU1.69
B34_L20P: ZU1.71
B34_L21N: ZU1.73
B34_L22N: ZU1.77
B34_L22P: ZU1.75
B34_L23P: ZU1.79
B34_LN1: ZU1.28
B34_LN2: R21.1 ZU1.29 | length 4532.3
  Top Layer w10: v1(4257.64,5425) ZU1.29@4257.64,5487.44 ; R21.1@7260.86,3906.73 v1(7260.86,3950)
  Bottom Layer w10: v1(4257.64,5425) 4257.64,5177.36 4290,5145 6430,5145 6450,5125 6450,4075 6470,4055 7245,4055 7260.86,4039.14 v1(7260.86,3950)
B34_LN3: ZU1.32
B34_LN4: ZU1.33
B34_LN5: P11.2 ZU1.38 | length 405.9
  Top Layer w10: P11.2@4010,6035 4010,5820 4057.64,5772.36 ZU1.38@4057.64,5648.86
B34_LN6: ZU1.39
B34_LN7: P11.4 ZU1.42 | length 405.9
  Top Layer w10: P11.4@3910,6035 3910,5805 3957.64,5757.36 ZU1.42@3957.64,5648.86
B34_LN8: ZU1.43
B34_LN10: P11.6 ZU1.48 | length 387.1
  Top Layer w10: ZU1.48@3807.64,5648.86 3810,5651.22 P11.6@3810,6035
B34_LN11: ZU1.47
B34_LN13: P11.8 ZU1.52 | length 387.1
  Top Layer w10: ZU1.52@3707.64,5648.86 3710,5651.22 P11.8@3710,6035
B34_LN15: P11.10 ZU1.58 | length 407.8
  Top Layer w10: ZU1.58@3557.64,5648.86 3557.64,5712.64 3610,5765 P11.10@3610,6035
B34_LN17: P11.12 ZU1.62 | length 407.8
  Top Layer w10: ZU1.62@3457.64,5648.86 3457.64,5722.64 3510,5775 P11.12@3510,6035
B34_LN19: P11.14 ZU1.66 | length 407.8
  Top Layer w10: ZU1.66@3357.64,5648.86 3357.64,5757.64 3410,5810 P11.14@3410,6035
B34_LN20: P11.16 ZU1.72 | length 428.5
  Top Layer w10: ZU1.72@3207.64,5648.86 3207.64,5747.64 3310,5850 P11.16@3310,6035
B34_LN23: P11.19 ZU1.80 | length 569.5
  Top Layer w10: ZU1.80@3007.64,5648.86 3007.64,6102.64 3040,6135 P11.19@3110,6135
B34_LN24: P11.20 ZU1.78 | length 437.1
  Top Layer w10: ZU1.78@3057.64,5648.86 3057.64,6032.64 3060,6035 P11.20@3110,6035
B34_LP1: ZU1.26
B34_LP2: R20.1 ZU1.27 | length 4552.3
  Top Layer w10: v1(4307.64,5425) ZU1.27@4307.64,5487.44 ; R20.1@7319.48,3906.73 7320,3907.25 v1(7320,3950)
  Bottom Layer w10: v1(4307.64,5425) 4307.64,5195 4322.64,5180 6460,5180 6480,5160 6480,4095 6495,4080 7300,4080 7320,4060 v1(7320,3950)
B34_LP3: ZU1.30
B34_LP4: ZU1.31
B34_LP5: P11.1 ZU1.36 | length 564.7
  Top Layer w10: P11.1@4010,6135 4075,6135 4107.64,6102.36 ZU1.36@4107.64,5648.86
B34_LP6: ZU1.37
B34_LP7: P11.3 ZU1.40 | length 526.6
  Top Layer w10: P11.3@3910,6135 3960,6085 3960,5800 4007.64,5752.36 ZU1.40@4007.64,5648.86
B34_LP8: ZU1.41
B34_LP10: P11.5 ZU1.46 | length 505.9
  Top Layer w10: P11.5@3810,6135 3857.64,6087.36 ZU1.46@3857.64,5648.86
B34_LP11: ZU1.45
B34_LP13: P11.7 ZU1.50 | length 505.9
  Top Layer w10: P11.7@3710,6135 3757.64,6087.36 ZU1.50@3757.64,5648.86
B34_LP15: P11.9 ZU1.56 | length 529.8
  Top Layer w10: ZU1.56@3607.64,5648.86 3607.64,5717.64 3661.5,5771.5 3661.5,6083.5 P11.9@3610,6135
B34_LP17: P11.11 ZU1.60 | length 530.2
  Top Layer w10: ZU1.60@3507.64,5648.86 3507.64,5707.64 3562,5762 3562,6083 P11.11@3510,6135
B34_LP18: P11.15 ZU1.70 | length 547.3
  Top Layer w10: ZU1.70@3257.64,5648.86 3257.64,5730 3357.64,5830 3357.64,6087.36 P11.15@3310,6135
B34_LP19: P11.13 ZU1.64 | length 528.5
  Top Layer w10: ZU1.64@3407.64,5648.86 3407.64,5747.64 3460,5800 3460,6085 P11.13@3410,6135
B34_LP21: P11.17 ZU1.74 | length 547.3
  Top Layer w10: ZU1.74@3157.64,5648.86 3157.64,5772.64 3257.64,5872.64 3257.64,6087.36 P11.17@3210,6135
B34_LP24: P11.18 ZU1.76 | length 428.5
  Top Layer w10: ZU1.76@3107.64,5648.86 3107.64,5797.64 3210,5900 P11.18@3210,6035
B35_LN1: Rp11.7 Rp13.7 U6.4 | length 3823.8
  Top Layer w10: Rp13.7@4344.84,3194.25 4344.84,3110.16 4355,3100 6640,3100 6655,3085 v1(6655,2740.75) 6655,2280 6680,2255 U6.4@6794.13,2255 ; Rp11.7@6190.32,2740.75 v1(6250,2740.75)
  Bottom Layer w10: v1(6250,2740.75) v1(6655,2740.75)
B35_LN2: ZU1.104
B35_LN3: Rp12.6 Rp13.5 U6.15 | length 3530.2
  Top Layer w10: Rp13.5@4303.5,3194.25 4303.5,3071.5 4320,3055 6525,3055 6555,3025 6555,2395 6515,2355 U6.15@6435.87,2355 v1(6370,2355) ; Rp12.6@6190.32,2509.25 v1(6260,2509.25)
  Bottom Layer w10: v1(6260,2509.25) 6300.75,2509.25 6340,2470 6340,2365 6350,2355 v1(6370,2355)
B35_LN4: ZU1.108
B35_LN5: Rp9.7 Rp14.7 U5.4 | length 3030.6
  Top Layer w10: Rp14.7@4094.84,3194.25 4094.84,3055.16 4140,3010 5605,3010 5635,2980 v1(5635,2740.75) 5635,2280 5660,2255 U5.4@5775.13,2255 ; Rp9.7@5165.32,2740.75 v1(5240,2740.75)
  Bottom Layer w10: v1(5240,2740.75) v1(5635,2740.75)
B35_LN6: ZU1.114
B35_LN7: Rp10.6 Rp14.5 U5.15 | length 2725.3
  Top Layer w10: Rp14.5@4053.5,3194.25 4053.5,2991.34 4079.84,2965 5495,2965 5515,2945 5515,2390 5480,2355 U5.15@5416.87,2355 v1(5340,2355) ; Rp10.6@5165.32,2509.25 v1(5240,2509.25)
  Bottom Layer w10: v1(5240,2509.25) 5265.75,2509.25 5305,2470 5305,2370 5320,2355 v1(5340,2355)
B35_LN8: ZU1.118
B35_LN9: Rp7.7 Rp15.7 U4.4 | length 2246.5
  Top Layer w10: Rp15.7@3849.84,3194.25 3849.84,2937.8 3867.64,2920 4555,2920 4620,2855 v1(4620,2740) 4620,2290 4655,2255 U4.4@4756.13,2255 ; Rp7.7@4150.32,2740.75 4209.25,2740.75 v1(4210,2740)
  Bottom Layer w10: v1(4210,2740) v1(4620,2740)
B35_LN10: ZU1.124
B35_LN11: Rp8.6 Rp15.5 U4.15 | length 1987.5
  Top Layer w10: Rp15.5@3808.5,3194.25 3808.5,2891.5 3830,2870 4470,2870 4510,2830 4510,2370 4495,2355 U4.15@4397.87,2355 v1(4325,2355) ; Rp8.6@4150.32,2509.25 4209.25,2509.25 v1(4210,2510)
  Bottom Layer w10: v1(4210,2510) 4235,2510 4255,2490 4255,2375 4275,2355 v1(4325,2355)
B35_LN12: ZU1.128
B35_LN13: Rp5.7 Rp16.7 U3.4 | length 1550.4
  Top Layer w10: Rp5.7@3120.32,2740.75 v1(3180,2740.75) ; Rp16.7@3599.84,3194.25 3599.84,2265 3609.84,2255 U3.4@3737.13,2255
  Bottom Layer w10: v1(3180,2740.75) v1(3600,2740.75)
B35_LN14: Rp12.7 Rp19.2 U6.13 | length 4620.4
  Top Layer w10: Rp19.2@3639.84,3710.75 3642.13,3713.03 3642.13,3777.13 3650,3785 v1(3660,3785) ; Rp12.7@6190.32,2540.75 6294.25,2540.75 6380,2455 U6.13@6435.87,2455 6508.15,2455 6525,2471.85 v1(6525,2825)
  Bottom Layer w10: v1(3660,3785) 3680,3785 3690,3775 3690,2950 3700,2940 6505,2940 6525,2920 v1(6525,2825)
B35_LN15: Rp6.6 Rp16.5 U3.15 | length 1367
  Top Layer w10: Rp6.6@3120.32,2509.25 v1(3180,2509.25) ; v1(3300,2355) U3.15@3378.87,2355 3477.36,2355 3505,2382.64 3505,2840 3558.5,2893.5 Rp16.5@3558.5,3194.25
  Bottom Layer w10: v1(3180,2509.25) 3220.75,2509.25 3240,2490 3240,2365 3250,2355 v1(3300,2355)